# EAGLE board CH340G adapter (EAGLE 9.5.2)
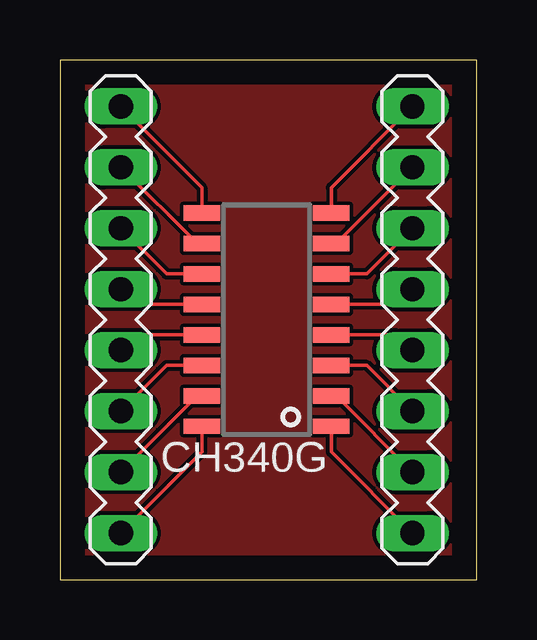
[diagram p0: board, top side]
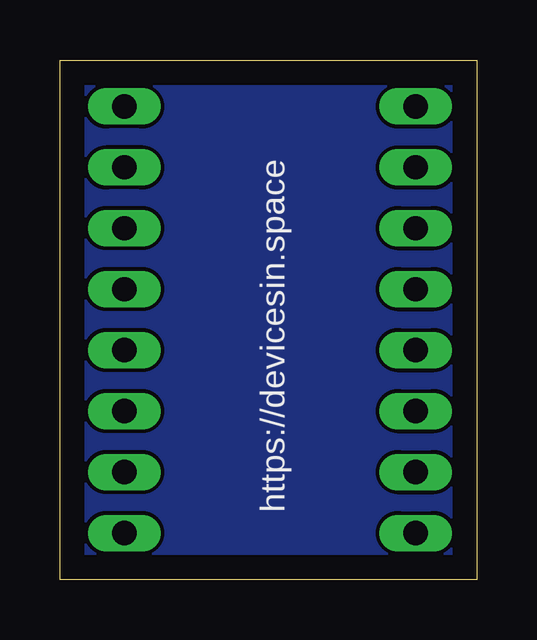
[diagram p1: board, bottom side, seen from below]

Size 17.38 x 21.65 mm. Coordinates in mm from the lower left corner, seen from the top.
Outline: 0,0 17.38,0 17.38,21.65 0,21.65 0,0
Copper layers (1*16): Top 0.035mm / dielectric 1.5mm / Bottom 0.035mm
Design rules "default": minimum track width 6mil, minimum drill 0.35mm, track to track 6mil, track to pad 6mil, pad to pad 6mil, via to via 6mil, smd to smd 6mil, copper to edge 40mil, drill to drill 6mil, minimum pad ring 10mil, minimum via ring 8mil, stop-mask expansion 4mil, vias tented up to drill 0mil, thermal gap 10mil

## Footprints (pad centres in the part's own frame; a part is rotated, then mirrored left to right if it is on the bottom)
MA08-1 = drill 1.016 long: 1 -8.89,0; 2 -6.35,0; 3 -3.81,0; 4 -1.27,0; 5 1.27,0; 6 3.81,0; 7 6.35,0; 8 8.89,0
SOIC16 = smd 0.635 x 1.524: 1 -4.445,-2.695; 2 -3.175,-2.695; 3 -1.905,-2.695; 4 -0.635,-2.695; 5 0.635,-2.695; 6 1.905,-2.695; 7 3.175,-2.695; 8 4.445,-2.695; 9 4.445,2.695; 10 3.175,2.695; 11 1.905,2.695; 12 0.635,2.695; 13 -0.635,2.695; 14 -1.905,2.695; 15 -3.175,2.695; 16 -4.445,2.695

## Placement (x,y rotation side)
SV1  [MA08-1]  14.7,10.83 270 top
SV2  [MA08-1]  2.54,10.83 90 top
U$1  CH340G  [SOIC16]  8.62,10.83 90 top

## Library data of the parts
SV1 SV2 = con-lstb; OC_FARNELL: unknown; OC_NEWARK: unknown
U$1 = ch340g

## Nets
N$1: SV1.8 U$1.1
N$2: SV1.7 U$1.2
N$3: SV1.6 U$1.3
N$4: SV1.5 U$1.4
N$5: SV1.4 U$1.5
N$6: SV1.3 U$1.6
N$7: SV1.2 U$1.7
N$8: SV1.1 U$1.8
N$9: SV2.8 U$1.9
N$10: SV2.7 U$1.10
N$11: SV2.6 U$1.11
N$12: SV2.5 U$1.12
N$13: SV2.4 U$1.13
N$14: SV2.3 U$1.14
N$15: SV2.2 U$1.15
N$16: SV2.1 U$1.16

## Tracks (layer width: path | path; a pad name or v marks a point on that pad's centre or on a via)
GND
  pour Top: 17.6,-0.2 17.6,21.8 0,21.8 0,0 0.2,-0.2
  pour Bottom: -0.2,21.8 17.4,21.8 17.6,21.6 17.6,0 17.4,-0.2 -0.2,-0.2
N$1
  Top 0.152: SV1.8 11.31,5.33 U$1.1
N$2
  Top 0.152: SV1.7 11.53,7.66 U$1.2
N$3
  Top 0.152: SV1.6 12.79,8.93 U$1.3
N$4
  Top 0.152: SV1.5 14.06,10.2 U$1.4
N$5
  Top 0.152: SV1.4 14.06,11.46 U$1.5
N$6
  Top 0.152: SV1.3 12.79,12.73 U$1.6
N$7
  Top 0.152: SV1.2 11.53,14.01 U$1.7
N$8
  Top 0.152: SV1.1 11.31,16.34 U$1.8
N$9
  Top 0.152: SV2.8 5.92,16.34 U$1.9
N$10
  Top 0.152: SV2.7 5.71,14.01 U$1.10
N$11
  Top 0.152: SV2.6 4.45,12.73 U$1.11
N$12
  Top 0.152: SV2.5 3.17,11.46 U$1.12
N$13
  Top 0.152: SV2.4 3.17,10.2 U$1.13
N$14
  Top 0.152: SV2.3 4.45,8.93 U$1.14
N$15
  Top 0.152: SV2.2 5.71,7.66 U$1.15
N$16
  Top 0.152: SV2.1 5.92,5.33 U$1.16

## Text on the board
bPlace: https://devicesin.space